# Altium PCB PCB1.PcbDoc
Units mil, origin at the board's own origin, x right, y up, seen from the top; angles counter-clockwise.
Board outline 2305 x 1655 mil, 2 copper layers (Top Layer, Bottom Layer); 11 components, 10 nets, 37 pads, 3 vias.
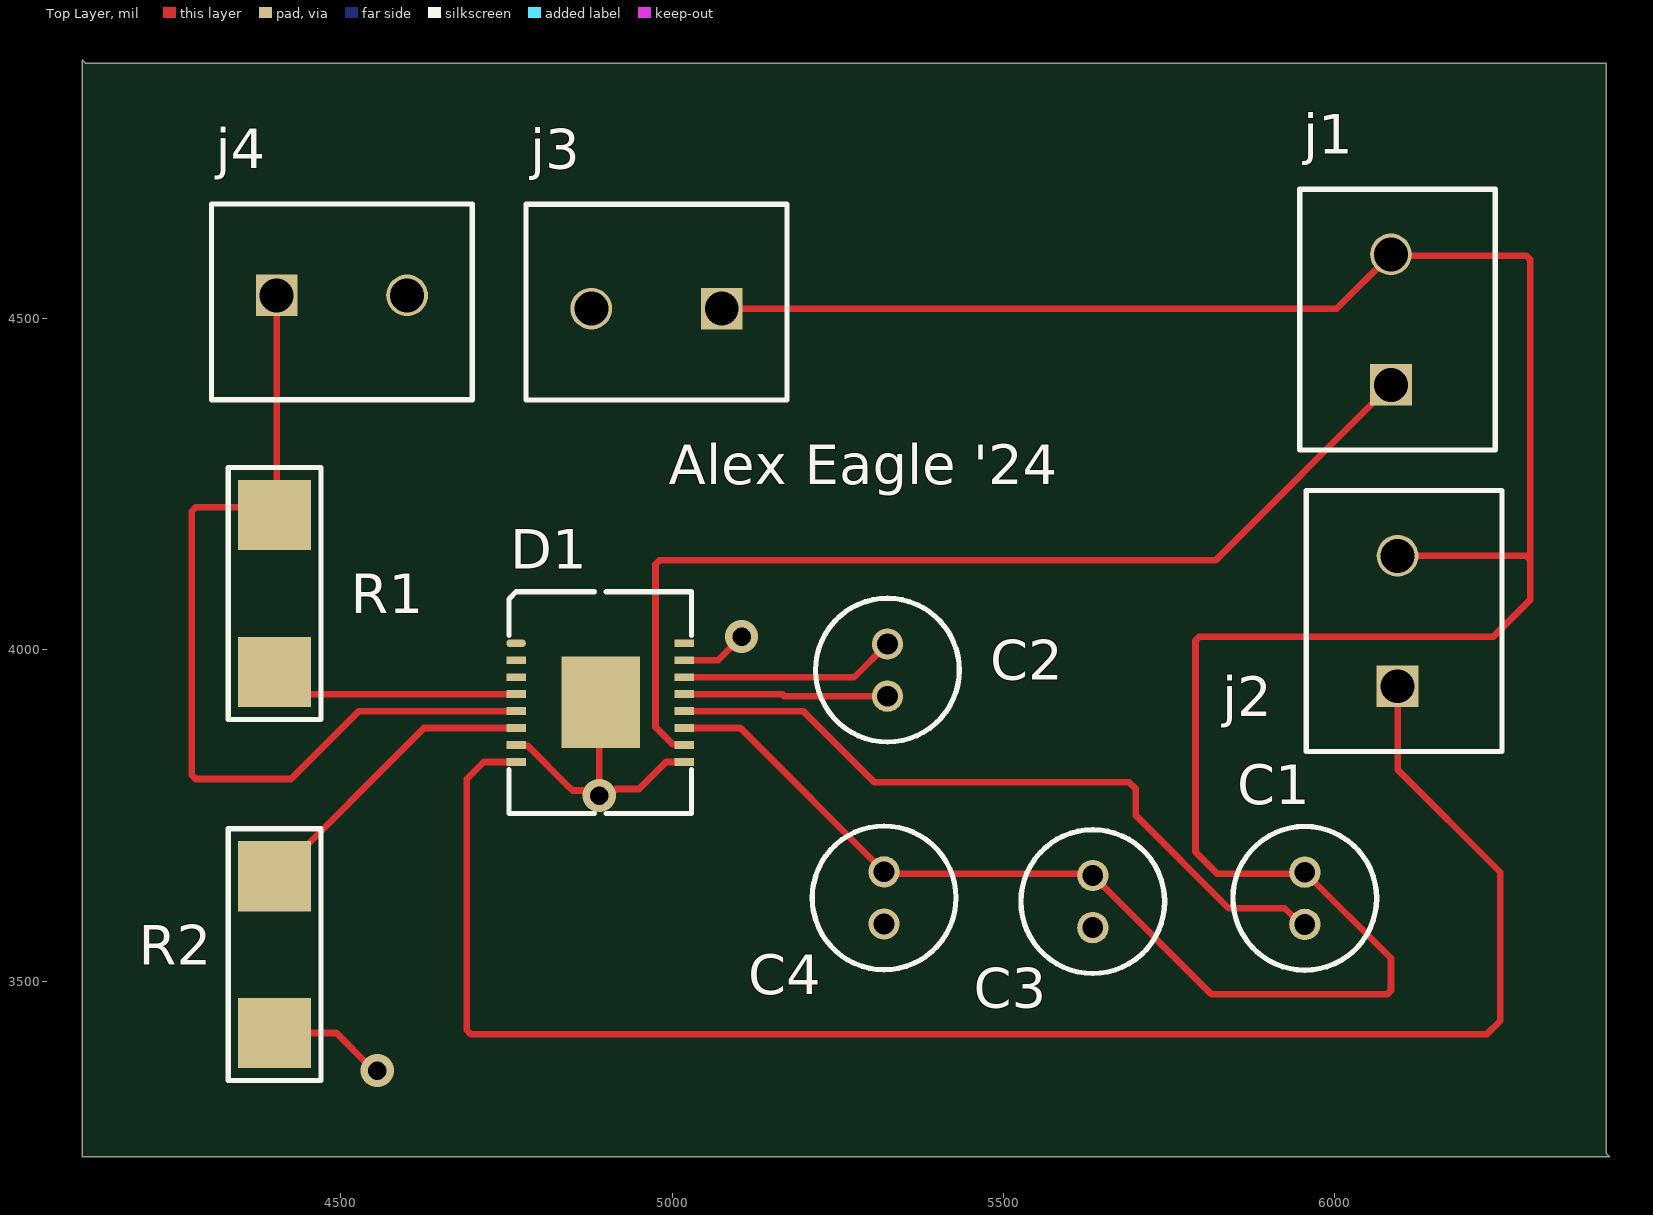
[diagram p0: Top Layer view]
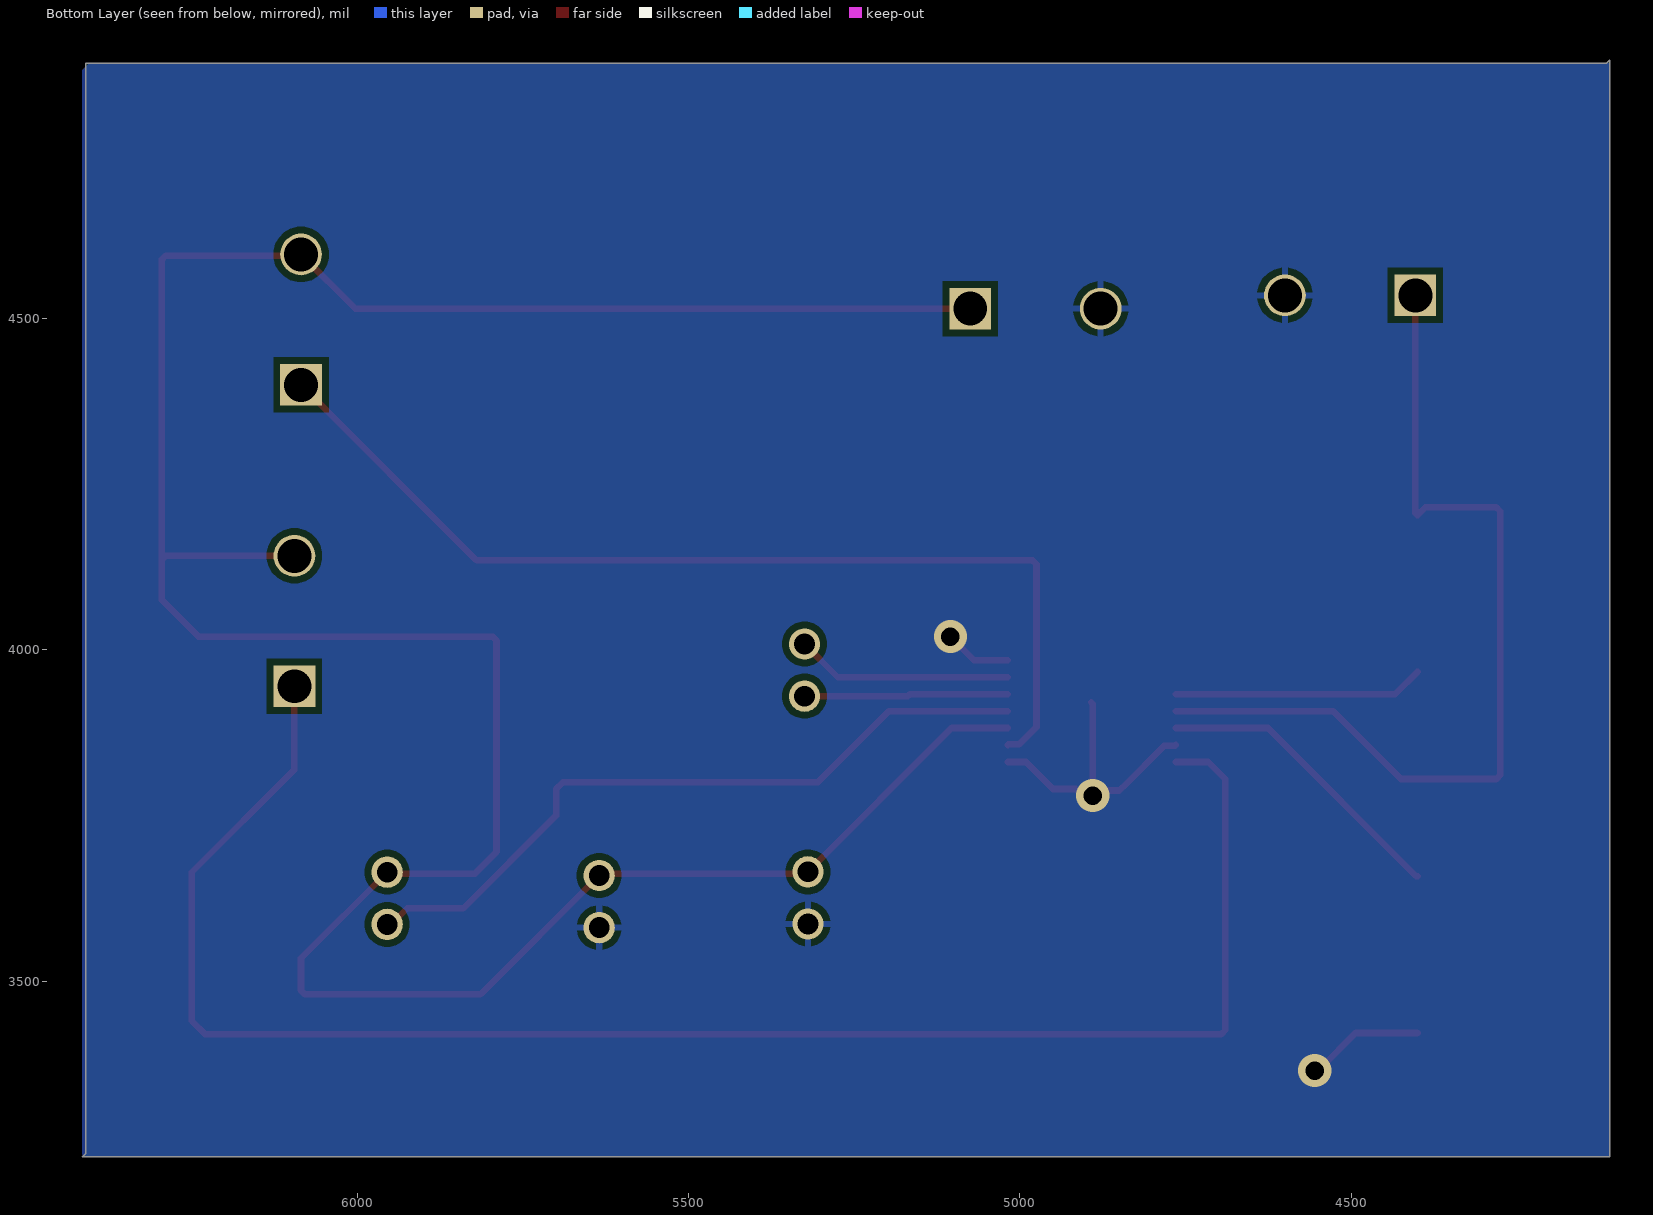
[diagram p1: Bottom Layer view, seen from below]
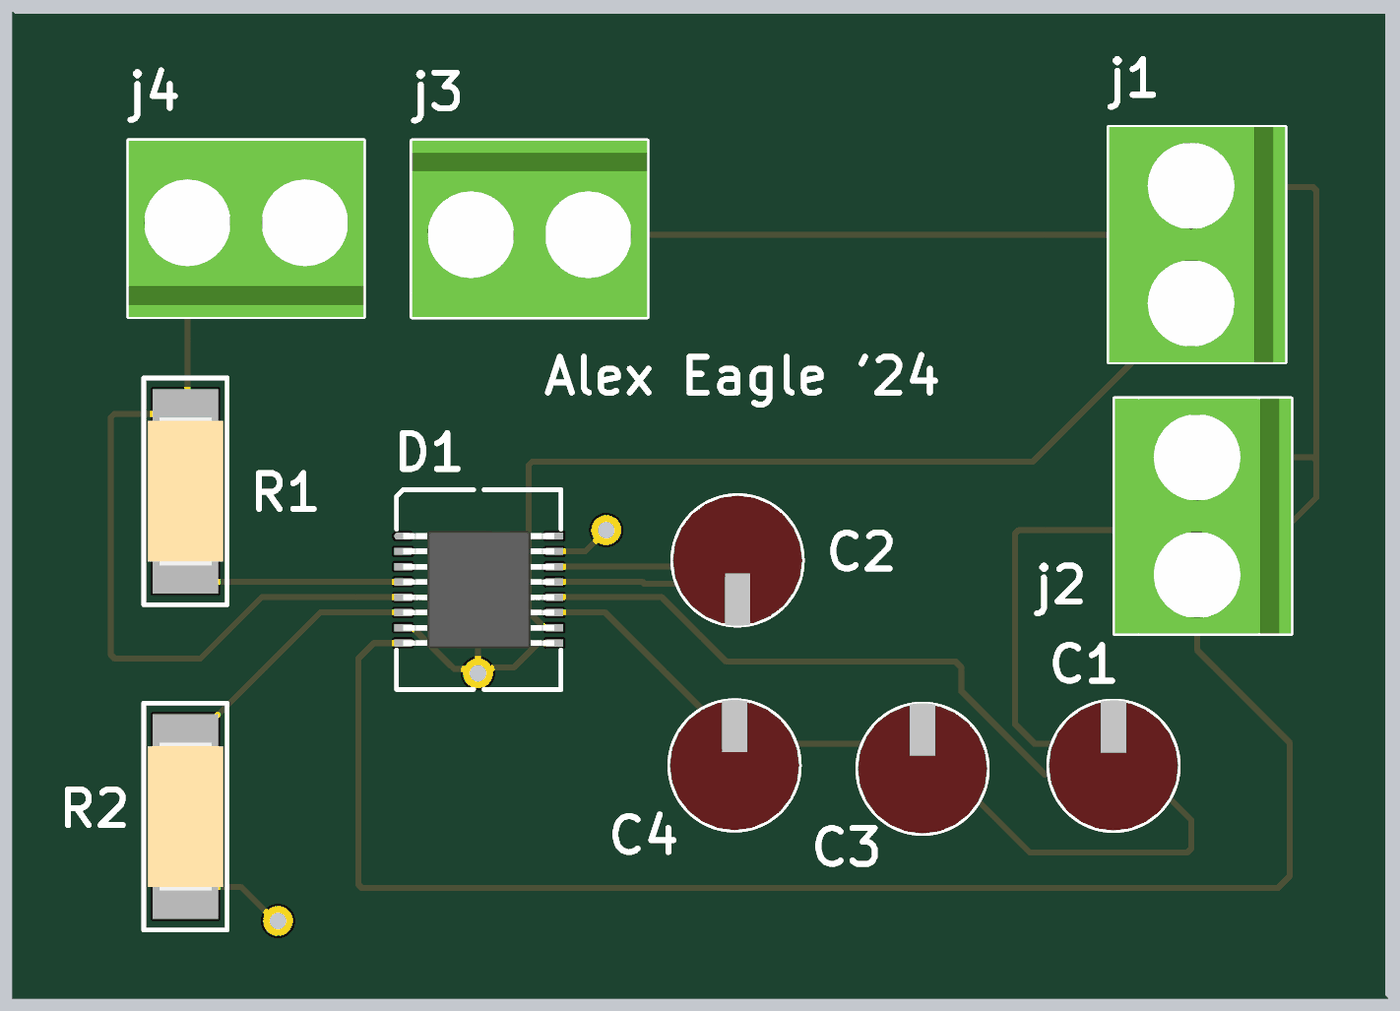
[diagram p2: 3D render of the assembled board from above, using the file's embedded part models]

## Layer stack, top to bottom
Top Solder: solder mask 0.4, Solder Resist, Dk 3.5
Top Layer: signal copper 1.4
Dielectric 1: dielectric 12.6, FR-4, Dk 4.8
Bottom Layer: signal copper 1.4
Bottom Solder: solder mask 0.4, Solder Resist, Dk 3.5

## Board outline
4110,4890 4115,4885 6410,4885 6410,3240 6415,3235 4110,3235 4110,4885

## Design rules (kind name [scope] priority, off if disabled: settings)
Clearance [All] p1: gap=10 ignorepadtopadclearanceinfootprint=FALSE except(0: Arc-Hole Track-Hole SMDPad-Hole THPad-Hole Via-Hole Fill-Hole Poly-Hole Region-Hole Text-Hole)
PolygonConnect [All] p1: connectstyle=Relief reliefconductorwidth=10 reliefentries=4 polygonreliefangle="90 Angle" airgapwidth=10
RoutingVias [All] p1: holewidth=28 width=50 viastyle="Through Hole" minholewidth=28 minwidth=50 maxholewidth=28 maxwidth=50
SolderMaskExpansion [All] p1: expansion=4 istentingtop=FALSE
Width [All] p1: maxlimit=10 minlimit=10 preferedwidth=10
30 further rules are at their usual default settings.

## Components (designator, comment, footprint, x,y, rotation, side; value= is the part's Value field where it differs from the comment)
C1 "0.1uf" Capacitor 5955,3625 r90 top
C2 "0.022uf" Capacitor 5325,3969.37 r270 top
C3 "0.1uf" Capacitor 5635,3620 r90 top
C4 "Cbulk" Capacitor 5320,3625.63 r90 top
D1 "DRV8874" LCC16 4891.46,3920.31 r0 top (schematic designator D?)
j1 "terminal" "TERMINAL - duplicate" 6085,4400 r90 top
j2 "terminal" "TERMINAL - duplicate" 6095,3945 r90 top
j3 "terminal" "TERMINAL - duplicate" 5075,4515 r180 top
j4 "terminal" "TERMINAL - duplicate" 4403.15,4535 r0 top
R1 "10k" Resistor 4400,4085 r270 top
R2 "Ri" Resistor 4400,3540 r90 top

## Footprints (in the part's own frame and the unit in brackets; to place one, negate y for a bottom-side part, rotate by r counter-clockwise, add the part's x,y. Pads: shape width x height; smd on the part's side, far side on the other; paste and mask are expansions set on the pad)
Capacitor [mm]
  round 1.2 hole 0.8: 1(-1,0) 2(1,0)
  silkscreen extent -2.76,-2.76 2.76,2.76, body extent -2.76,-2.75 2.79,2.75, height 12.51
LCC16 [mm]
  oval 0.75x0.3 smd: 1(-3.224,2.275)
  rect 0.75x0.3 smd: 2(-3.224,1.625) 3(-3.224,0.975) 4(-3.224,0.325) 5(-3.224,-0.325) 6(-3.224,-0.975) 7(-3.224,-1.625) 8(-3.224,-2.275) 9(3.224,-2.275) 10(3.224,-1.625) 11(3.224,-0.975) 12(3.224,-0.325) 13(3.224,0.325) 14(3.224,0.975) 15(3.224,1.625) 16(3.224,2.275)
  rect 3x3.5 smd: 17(0.023,0.01)
  silkscreen extent -3.5,-4.25 3.5,4.25, body extent -3.21,-2.5 3.21,2.5, height 1
Resistor [mm]
  rect 2.69x2.79 smd: 1(-3.005,0) 2(3.005,0)
  silkscreen extent -4.83,-1.78 4.83,1.78, body extent -3.15,-1.6 3.15,1.6, height 2.49
"TERMINAL - duplicate" [mm]
  rect 1.6x1.6 hole 1.3: 1(0,0)
  round 1.6 hole 1.3: 2(5,0)
  silkscreen extent -2.5,-4 7.5,3.5, body extent -2.5,-4 7.5,3.5, height 11.5

## Part data
C1 C2 C3 C4: library part capacitor, "Aluminum Electrolytic Capacitor, Aluminum (wet)", Capacitor Type=Aluminium, Manufacturer="Wurth Electronics", Manufacturer Part Number=860020672005, Supplier Part Number=732-8851-1-ND, Category="Aluminum Electrolytic Capacitors", ComponentLink1Description=https://datasheet.ciiva.com:443/pdfs/VipMasterIC/IC/MIDC/MIDC-S-A0000764616/MIDC-S-A0000764162-1.pdf?src-supplier=IHS+Markit, ComponentLink1URL=https://datasheet.ciiva.com:443/pdfs/VipMasterIC/IC/MIDC/MIDC-S-A0000764616/MIDC-S-A0000764162-1.pdf?src-supplier=IHS+Markit, ComponentLink2Description=http://www.farnell.com/datasheets/1879647.pdf?src-supplier=Farnell, ComponentLink2URL=http://www.farnell.com/datasheets/1879647.pdf?src-supplier=Farnell, ComponentLink3Description=http://katalog.we-online.de/pbs/datasheet/860020672005.pdf?src-supplier=Digikey, ComponentLink3URL=http://katalog.we-online.de/pbs/datasheet/860020672005.pdf?src-supplier=Digikey, ComponentLink4Description=https://katalog.we-online.de/pbs/datasheet/860020672005.pdf?src-supplier=Digikey, ComponentLink4URL=https://katalog.we-online.de/pbs/datasheet/860020672005.pdf?src-supplier=Digikey, ComponentLink5Description=http://www.farnell.com/datasheets/1879647.pdf?src-supplier=Element14, ComponentLink5URL=http://www.farnell.com/datasheets/1879647.pdf?src-supplier=Element14, Dielectric Material=Aluminium, Pins=2, Pricing="1=0.1, 50=0.089, 100=0.078, 250=0.069, 500=0.06, 1000=0.058 (USD)", Reach SVHC Compliant=Yes, RoHS=Yes, RoHS Compliant=Yes, Stock=10459, Supplier=Digikey
j1 j2 j3 j4: library part terminal_1, "Barrier Strip Terminal Block", Manufacturer="Wurth Electronics", Manufacturer Part Number=691137710002, Supplier Part Number=1769908, Category="Terminal Blocks", ComponentLink1Description=https://datasheet.ciiva.com:443/pdfs/VipMasterIC/IC/MIDC/MIDC-S-A0005074262/MIDC-S-A0004711666-1.pdf?src-supplier=IHS+Markit, ComponentLink1URL=https://datasheet.ciiva.com:443/pdfs/VipMasterIC/IC/MIDC/MIDC-S-A0005074262/MIDC-S-A0004711666-1.pdf?src-supplier=IHS+Markit, ComponentLink2Description=https://katalog.we-online.de/em/datasheet/691137710002.pdf?src-supplier=Digikey, ComponentLink2URL=https://katalog.we-online.de/em/datasheet/691137710002.pdf?src-supplier=Digikey, Pricing="500=0.218, 1000=0.202, 2500=0.189 (GBP)", RoHS=No, RoHS Compliant=Yes, Stock=355, Supplier=Rs
R1 R2: library part Resistor, "RES SMD 230OHM 0.01% 1/4W J LEAD", Part Number=Y1121230R000T9L-ND, ComponentLink1Description=DigiKey, ComponentLink1URL=https://www.digikey.com/en/products/detail/vpg-foil-resistors/Y1121230R000T9L/4225988
D1: ComponentLink1Description=DigiKey, ComponentLink1URL=https://www.digikey.com/en/products/detail/texas-instruments/DRV8874PWPR/11502339

## Via types
v1: diameter 50, hole 28, Top Layer to Bottom Layer, 3 vias

## Nets (pads, with @x,y where several pads share a name; then routed paths per layer and width w, separated by ;. In a path a pad name is that pad's centre, name@x,y a point inside that pad or via, vN(x,y) a via of type N, cw(c..) or ccw(c..) an arc to the next point about the centre after c; other vN are vias at no path point)
GND: C3.1 C4.1 D1.7 D1.9 D1.15 D1.17 j3.2 j4.2 R2.1 | length 716
  Top Layer w10: R2.1 4493.31,3421.69 v1@4545,3370 ; D1.7 4765.45,3855.43 4781.74,3855.43 4844.51,3792.65 4845,3792.65 4850,3787.65 4882.35,3787.65 v1(4890,3780) ; D1.17 4890,3918.32 v1(4890,3780) ; D1.9 4990.74,3830.74 4950,3790 4915.86,3790 4913.51,3787.65 4897.65,3787.65 v1(4890,3780) ; D1.15 5069.28,3984.28 v1(5105,4020)
  other v1: 4555,3365
NetC1_1: C1.1 D1.12 | length 1093.4
  Top Layer w10: D1.12 5197.82,3907.51 5305.33,3800 5690,3800 5700,3790 5700,3750 5840,3610 5924.75,3610 5949.12,3585.63 C1.1
NetC2_1: C2.1 D1.14 | length 327.3
  Top Layer w10: D1.14 5274.95,3958.69 C2.1
NetC2_2: C2.2 D1.13 | length 307.9
  Top Layer w10: D1.13 5165.97,3933.1 5169.07,3930 C2.2
NetD?_4: D1.4 R1.2 | length 378.5
  Top Layer w10: R1.2 4433.59,3933.1 D1.4
NetD?_6: D1.6 R2.2 | length 457.2
  Top Layer w10: R2.2 4401.97,3658.31 4625.58,3881.92 D1.6
NetD?_8: D1.8 j2.1 | length 2604.3
  Top Layer w10: D1.8 4715.74,3830.74 4690,3805 4690,3425.86 4695.86,3420 6230,3420 6250,3440 6250,3664.25 6095,3819.25 j2.1
NetD?_10: D1.10 j1.1 | length 1522.5
  Top Layer w10: D1.10 5017.48,3857.24 5001.19,3857.24 4975,3883.42 4975,4129.14 4980.86,4135 5820,4135 j1.1
VCC: D1.5 j4.1 R1.1 | length 1398
  Top Layer w10: j4.1 4403.15,4206.46 R1.1 4388.31,4215 4280.86,4215 4275,4209.14 4275,3810.86 4280.86,3805 4425,3805 4527.51,3907.51 D1.5
VM: C1.2 C3.2 C4.2 D1.11 j1.2 j2.2 j3.1 | length 4470.7
  Top Layer w10: D1.11 5103.08,3881.92 C4.2 5322.81,3662.18 5632.19,3662.18 C3.2 5814.37,3480 6079.14,3480 6085,3485.86 6085,3534.37 C1.2 5952.5,3661.87 5823.13,3661.87 5790,3695 5790,4014.14 5795.86,4020 6240,4020 6295,4075 6295,4135.99 ; j3.1 6003.15,4515 j1.2 6086.85,4595 6289.14,4595 6295,4589.14 6295,4135.99 ; j2.2 6289.14,4141.85 6295,4135.99
pads on no net: D1.1 D1.2 D1.3 D1.16

## Polygon pours and split planes (outlines as drawn)
GND on Bottom Layer "GND_L02_P000" (solid, pour order 0): 4105,4885 6405,4885 6415,4875 6415,3240 6420,3235 4110,3235 4110,4880

## Silkscreen, mask and mechanical layers (free items; w line width, h text height)
Top Overlay:
  text "Alex Eagle '24" at 4995,4249.99 h60